# Altium PCB 主板-霍尔BC接地.PcbDoc (part 1 of 6)
Units mm, origin at the board's own origin, x right, y up, seen from the top; angles counter-clockwise.
Board outline 97.69 x 103.45 mm, 2 copper layers (Top Layer, Bottom Layer); 83 components, 83 nets, 266 pads, 295 vias.
Unrouted connection lines stored in the file: 11.
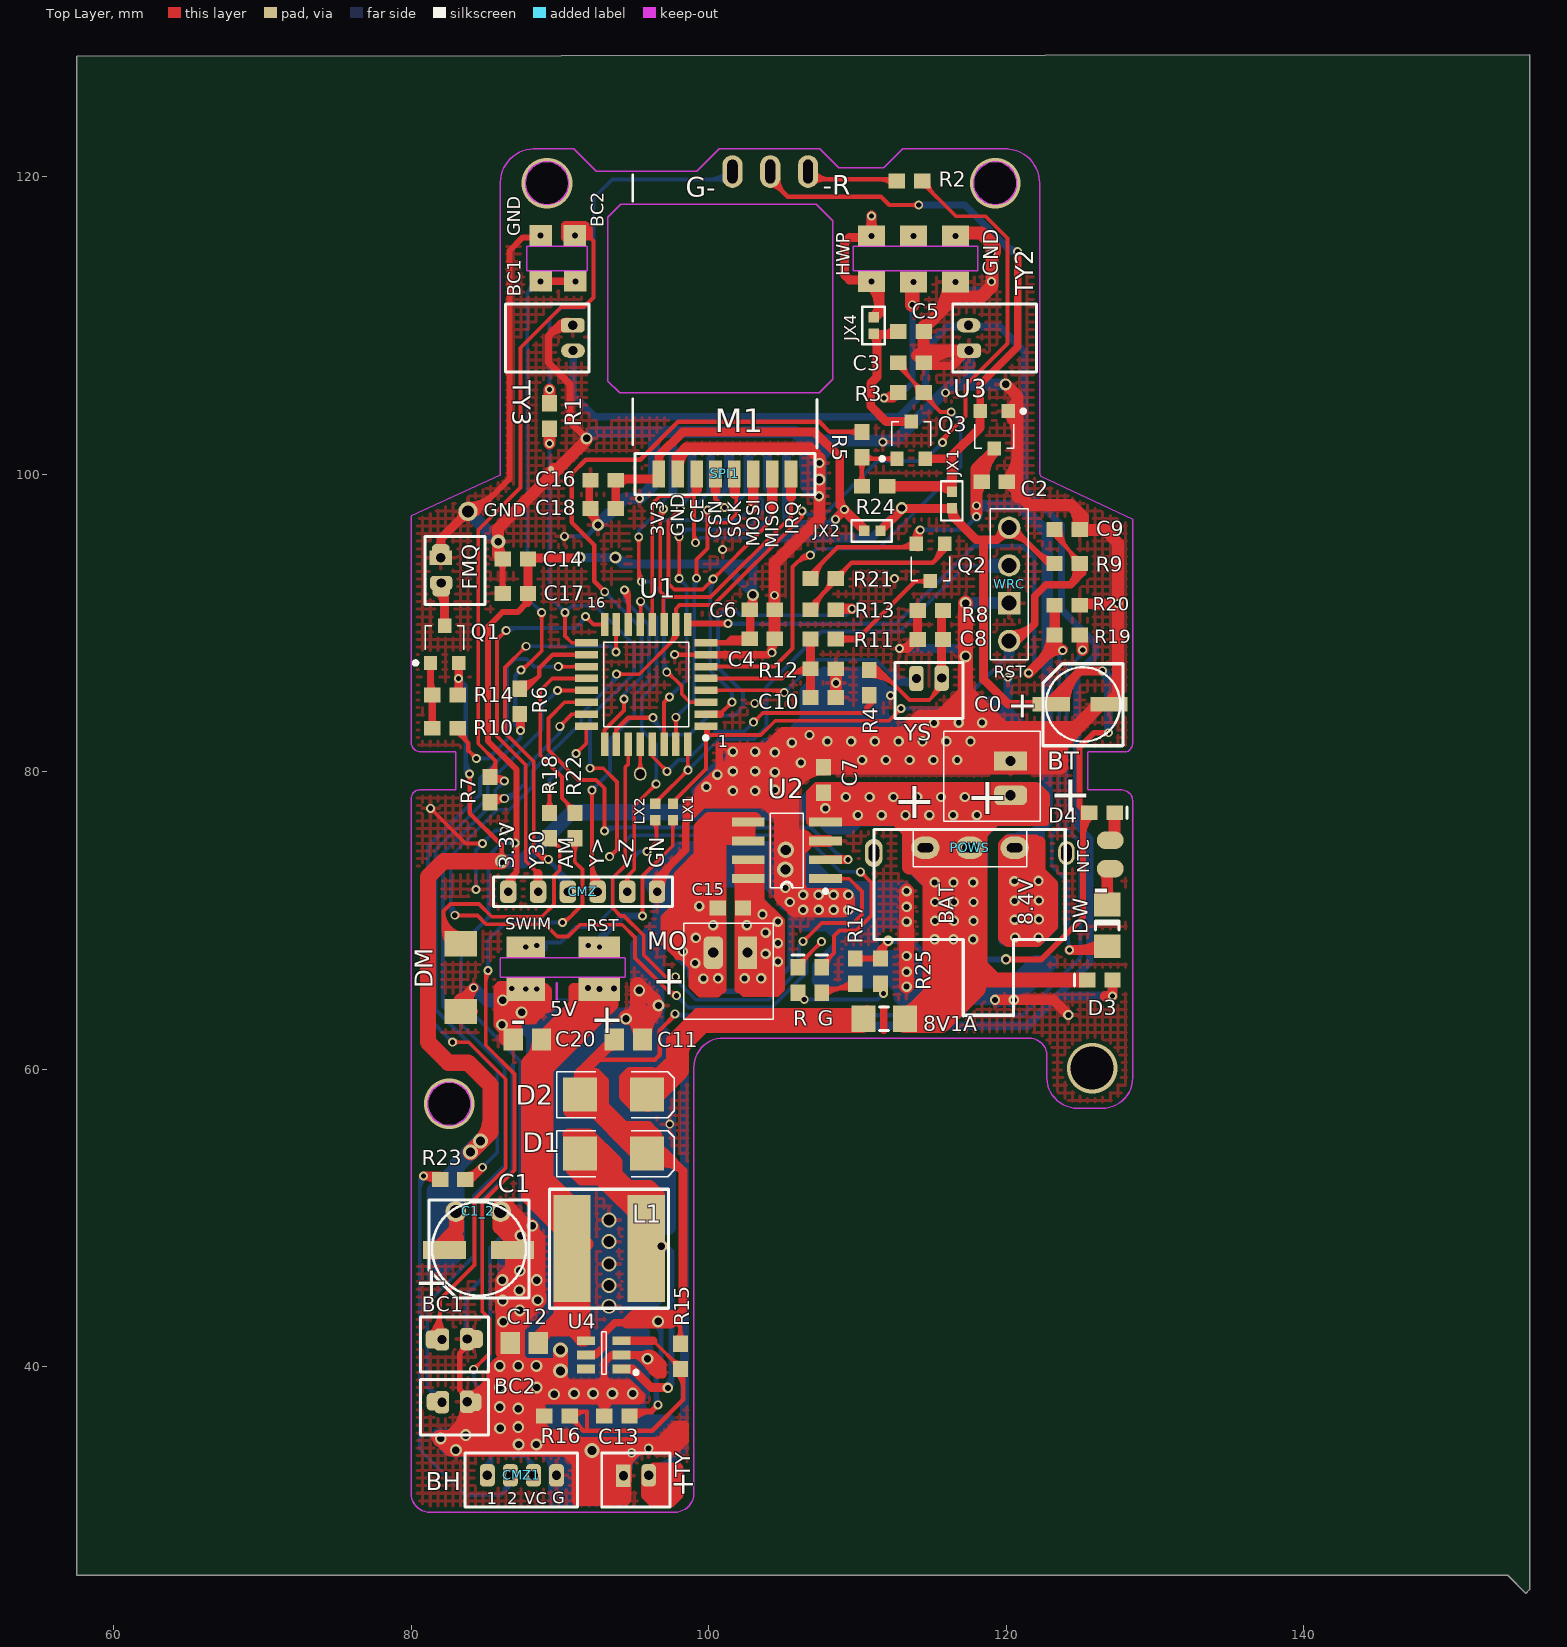
[diagram p0: Top Layer view]
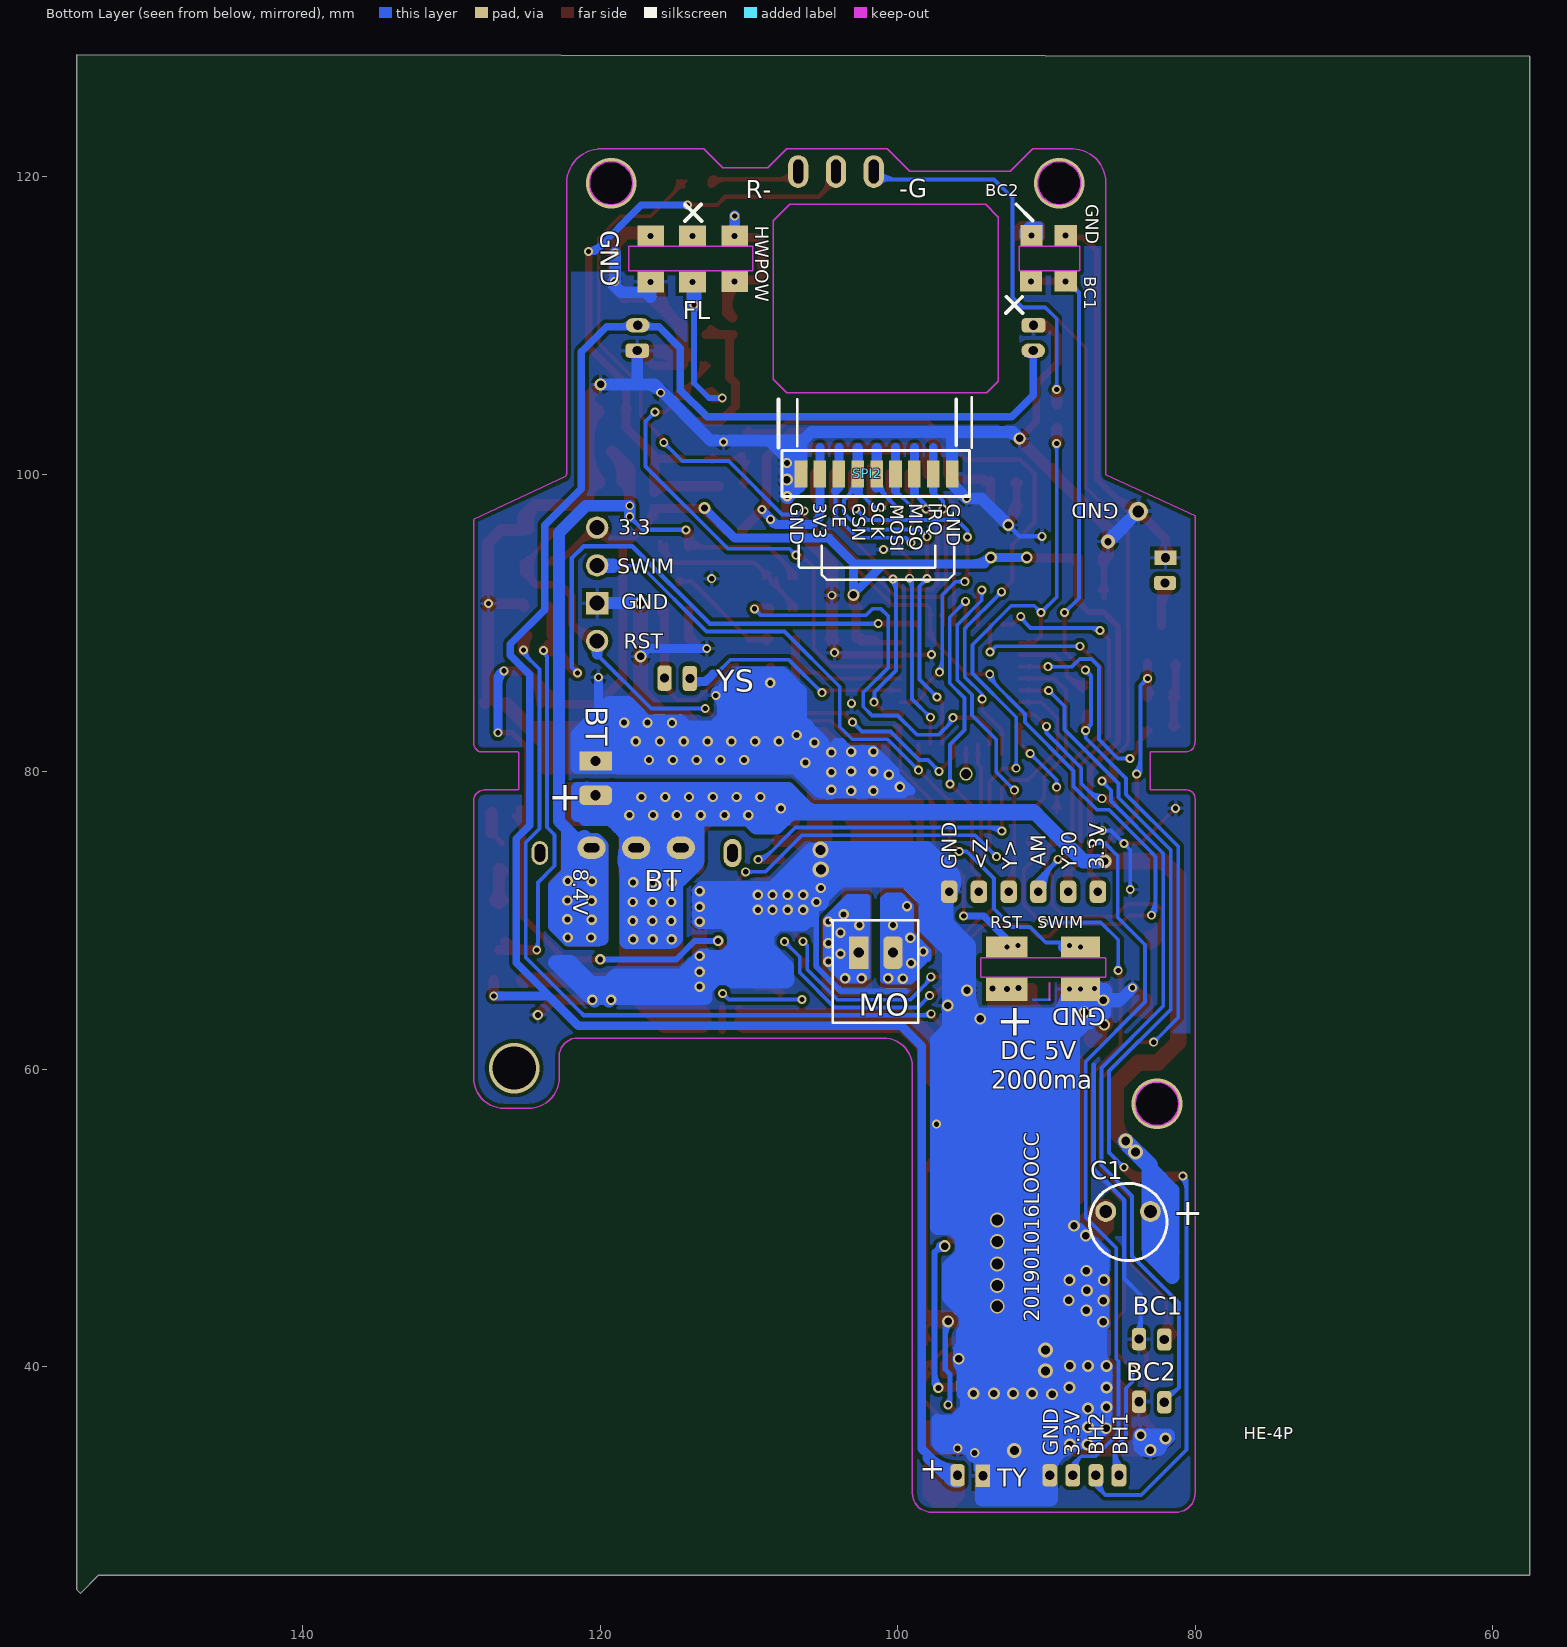
[diagram p1: Bottom Layer view, seen from below]

## Layer stack, top to bottom
Top Layer: signal copper 0.0356
Dielectric: dielectric 0.32, FR-4, Dk 4.8
Bottom Layer: signal copper 0.0356

## Board outline
57.506,128.118 57.506,25.984 153.721,25.984 154.94,24.765 155.194,25.019 155.194,128.219

## Design rules (kind name [scope] priority, off if disabled: settings)
Clearance [All] p1: gap=0.254
PolygonConnect [All] p1: connectstyle=Relief reliefconductorwidth=0.254 reliefentries=4 polygonreliefangle="90 Angle"
RoutingVias [All] p1: holewidth=0.711 width=1.27 viastyle="Through Hole" minholewidth=0.711 minwidth=1.27 maxholewidth=0.711 maxwidth=1.27
SilkscreenOverComponentPads [All] p1: minsilkscreentomaskgap=0.254
SolderMaskExpansion [All] p1: expansion=0.102
Width [All] p1: maxlimit=2 minlimit=0.254 preferedwidth=0.254 minimp=50.000000 maximp=50.000000 favimp=50.000000
27 further rules are at their usual default settings.

## Components (designator, comment, footprint, x,y, rotation, side; value= is the part's Value field where it differs from the comment)
8V1A "LED-DM" CR3216-1206 111.8,63.398 r180 top locked
BC1 "1.5*2P" MHDR1X2#1 83.6,41.859 r180 top locked (schematic designator BT)
BC2 "1.5*2P" MHDR1X2#1 83.6,37.643 r180 top locked (schematic designator BT)
BT "PH2.0-W" HDR1X2#1 120.3,78.032 r90 top locked
C0 "47uf  5*5.8" CC3216-1206#1 123.7,84.932 r0 top locked
C1 "220UF" CC3216-1206#2 85.3,47.39 r180 top locked
C1_2 "" HDR1X2#2 76.987,51 r180 top locked
C2 "0.1uf" CR1608-0603#1 119.2,99.5 r180 top locked
C3 "0.01uf" CR1608-0603#1 113.6,107.5 r180 top locked
C4 "0.1uf" CR1608-0603#1 103.6,88.951 r0 top locked (schematic designator C6)
C5 "10uf" CR1608-0603#1 113.6,109.6 r180 top locked (schematic designator C2)
C6 "0.01uf" CR1608-0603#1 103.6,90.9 r180 top locked (schematic designator C7)
C7 "0.1uf" CR1608-0603#1 107.723,79.45 r270 top locked (schematic designator C11)
C8 "100pf" CR1608-0603#1 114.9,88.9 r0 top locked
C9 "0.1uf" CR1608-0603#1 124.1,96.3 r180 top locked
C10 "100pf" CR1608-0603#1 107.7,85 r0 top locked (schematic designator R11)
C11 "10uf" CR2012-0805 94.6,62 r0 top locked
C12 "10uf" CR2012-0805 87.6,41.6 r180 top locked
C13 "1uf" CR1608-0603#1 93.83,36.7 r180 top locked
C14 "10uf" CR1608-0603#1 87,94.3 r180 top locked (schematic designator R6)
C15 "0.1uf" CR1608-0603#1 101.46,70.85 r0 top locked (schematic designator C4)
C16 "0.1uf" CR1608-0603#1 92.9,99.6 r0 top locked (schematic designator C4)
C17 "10uf" CR1608-0603#1 87,92 r180 top locked (schematic designator R6)
C18 "0.01uf" CR1608-0603#1 92.9,97.7 r0 top locked (schematic designator C4)
C20 "10uf" CR2012-0805 87.808,62 r0 top locked
CMZ "RST   SWIM" MHDR1X7#1 94.15,71.944 r180 top locked
CMZ1 "HE-4P" MHDR1X7#2 83,32.7 r0 top locked
D1 "SS24" DSO-C2/X2.3 93.6,54.33 r0 top locked
D2 "SS24" DSO-C2/X2.3 93.6,58.3 r0 top locked (schematic designator D3)
D3 "SS14" CC1608-0603 126.3,66 r0 top locked (schematic designator D8)
D4 "SS14" CC1608-0603 126.441,77.25 r180 top locked (schematic designator R4)
DM "3*4*2小龟按钮" HDR1X2#3 85.344,70.032 r90 top locked (schematic designator FW)
DW "WD" CC3216-1206#3 126.8,69.672 r270 top locked
FMQ "1.5*2P" MHDR1X2#2 81.991,94.234 r270 top locked (schematic designator BT)
G "LED-G" CC1608-0603 107.6,66 r270 top locked
JX1 "" CR1005-0402 116.357,98.273 r90 top locked (schematic designator R8)
JX2 "" CR1005-0402 111,96.2 r180 top locked
JX4 "" CR1005-0402 111.1,110 r90 top locked (schematic designator R8)
L1 "22UH" L7 93.3,47.94 r180 top locked
LX1 "4.7K" CR1005-0402 97.6,77.292 r90 top locked (schematic designator R8)
LX2 "4.7K" CR1005-0402 96.4,77.292 r90 top locked (schematic designator R8)
MO "PH2.0-W" HDR1X2#4 103,67.843 r180 top locked (schematic designator BT)
POWS "SS12F23" HDR1X3 120.114,74.892 r180 top locked (schematic designator WS)
Q1 "S8550" SO-G3/C2.5 82.245,88.57 r0 top locked (schematic designator Q2)
Q2 "S8550" SO-G3/C2.5 114.91,94.082 r180 top locked (schematic designator Q1)
Q3 "S8550" SO-G3/C2.5 113.614,102.3 r0 top locked (schematic designator U5)
R "LED-R" CC1608-0603 106,66 r270 top locked
R1 "1K" CR1608-0603#1 89.3,103.919 r270 top locked
R2 "1K" CR1608-0603#1 113.5,119.732 r0 top locked
R3 "1K" CR1608-0603#1 113.6,105.5 r180 top locked
R4 "1K" CR1608-0603#1 110.8,86 r270 top locked
R5 "10K" CR1608-0603#1 110.3,102 r90 top locked (schematic designator R7)
R6 "10K" CR1608-0603#1 87.3,84.734 r270 top locked
R7 "10K" CR1608-0603#1 85.3,78.8 r90 top locked (schematic designator R6)
R8 "1M" CR1608-0603#1 114.9,90.856 r180 top locked
R9 "10K" CR1608-0603#1 124.1,94 r180 top locked
R10 "10K" CR1608-0603#2 82.271,82.931 r0 top locked (schematic designator R7)
R11 "1M" CR1608-0603#1 107.7,88.932 r180 top locked (schematic designator C10)
R12 "500K" CR1608-0603#1 107.7,86.932 r180 top locked
R13 "22K" CR1608-0603#1 107.7,90.9 r0 top locked
R14 "22K" CR1608-0603#2 82.271,85.17 r180 top locked (schematic designator R7)
R15 "100K" CR1608-0603#1 98.1,40.7 r270 top locked
R16 "7.89K" CR1608-0603#1 89.8,36.7 r180 top locked
R17 "1K" CR1608-0603#1 109.855,66.6 r270 top locked (schematic designator R3)
R18 "10K" CR1608-0603#1 89.3,76.38 r90 top locked
R19 "10K" CR1608-0603#1 124.1,89.2 r180 top locked (schematic designator R9)
R20 "4.7K" CR1608-0603#1 124.1,91.2 r180 top locked
R21 "22K" CR1608-0603#1 107.7,93 r0 top locked
R22 "10K" CR1608-0603#1 91,76.38 r90 top locked (schematic designator R2)
R23 "10K" CR1608-0603#1 82.791,52.6 r0 top locked (schematic designator R2)
R24 "500K" CR1608-0603#1 111.157,99.2 r180 top locked (schematic designator R7)
R25 "1K" CR1608-0603#1 111.557,66.6 r270 top locked (schematic designator R3)
SPI1 "SI24R1" MHDR1X8 105.537,100.032 r180 top locked
SPI2 "NRF24RL01" MHDR1X8 97.6,100.032 r0 bottom locked
TY "1.5*2P" MHDR1X2#3 95.8,32.7 r180 top locked (schematic designator BT)
TY2 "1.5*2P" MHDR1X2#4 117.475,109.855 r270 top locked (schematic designator BT)
TY3 "1.5*2P" MHDR1X2#4 90.881,108.483 r90 top locked (schematic designator BT)
U1 "STM8L151K4T6" TQFP32 95.8,85.877 r180 top locked
U2 "MX380（RZ7889D）" SO8 105.254,74.722 r90 top locked
U3 "ME6209-V1RK" SO-G3/C2.5 119.2,103 r180 top locked (schematic designator U5)
U4 "SX1308   B6287K  B6286" SOT23-6_M 92.95,40.8 r180 top locked
WRC "2.54HP" HDR1X4 120.2,88.8 r90 top locked (schematic designator SX)
YS "1.5*2P" MHDR1X2#5 115.5,86.3 r180 top locked (schematic designator BT)

## Footprints (in the part's own frame and the unit in brackets; to place one, negate y for a bottom-side part, rotate by r counter-clockwise, add the part's x,y. Pads: shape width x height; smd on the part's side, far side on the other; paste and mask are expansions set on the pad)
CC1608-0603 [mm]
  rect 1.1x1 smd: 1(-0.85,0) 2(0.85,0)
  silkscreen extent -1.7,-0.4 -1.7,0.4
CC3216-1206#1 [mm]
  rect 2.5x1 smd: 1(-0.662,-0.386) 2(3.213,-0.386)
CC3216-1206#2 [mm]
  rect 2.9x1.2 smd: 1(-1.5,-0.45) 2(3.068,-0.455)
CC3216-1206#3 [mm] "Chip Capacito"
  rect 1.6x1.8 smd: 1(-1.4,0) 2(1.4,0)
  silkscreen extent -0.3,-0.8 0.3,0.8
CR1005-0402 [mm]
  rect 0.7x0.7 smd: 1(-0.55,0) 2(0.55,0)
CR1608-0603#1 [mm]
  rect 1.1x1 smd: 1(-0.85,0) 2(0.85,0)
CR1608-0603#2 [mm]
  rect 1.1x1 smd: 1(-0.85,0)
  rect 1.1x1 smd paste+0: 2(0.85,0)
CR2012-0805 [mm] "Chip Resistor; Body 2.0 x 1.3 mm (LxW typ)"
  rect 1.3x1.5 smd: 1(-0.95,0) 2(0.95,0)
CR3216-1206 [mm] "Chip Resistor; Body 3.2 x 1.6 mm (LxW t"
  rect 1.6x1.8 smd: 1(-1.4,0) 2(1.4,0)
  silkscreen extent -0.3,-0.8 0.3,0.8
DSO-C2/X2.3 [mm] "DO-214-AA/SMB; 2 C-Bend Leads; Body 5.3 x 3.6 mm, inc. leads (LxW)"
  rect 2.3x2.3 smd: 1(-2.25,0) 2(2.25,0)
  silkscreen extent -3.8,-1.55 4.1,1.55
HDR1X2#1 [mm]
  rrect50% 1.3x2.2 hole 0.68: 1(0.39,0)
  rect 1.3x2.2 hole 0.68: 2(2.692,0.003)
  silkscreen extent -1.34,-1.99 4.68,4.49
HDR1X2#2 [mm] "Connector; Header; 2 Position"
  round 1.4 hole 0.86: 1(-9.013,0.558) 2(-6.013,0.558)
HDR1X2#3 [mm]
  rect 1.7x2.2 smd: 1(-6.147,2.004) 2(-1.6,2.004)
HDR1X2#4 [mm]
  rect 1.3x2.2 hole 0.68: 1(0.39,0)
  rrect50% 1.3x2.2 hole 0.68: 2(2.692,0.003)
  silkscreen extent -1.34,-1.99 4.68,4.49
HDR1X3 [mm]
  oval 1.9x1.5 hole 0.6 slot 1.05 at 0 deg: 1(-0.46,0) 2(2.54,0) 3(5.54,0)
  silkscreen extent -1.27,-1.27 6.35,1.27
HDR1X4 [mm]
  round 1.5 hole 1: 1(0,0) 3(5.08,0) 4(7.62,0)
  rect 1.5x1.5 hole 1: 2(2.54,0)
  silkscreen extent -1.27,-1.27 8.89,1.27
L7 [mm]
  rect 2.5x7.2 smd: 1(2.5,0) 2(-2.5,0)
  silkscreen extent -4,-4 4,4
MHDR1X2#1 [mm]
  rrect50% 0.96x1.5 hole 0.62: 1(-0.164,0) 2(1.536,0.026)
  silkscreen extent -1.61,-1.49 2.97,2.22
MHDR1X2#2 [mm]
  rect 0.96x1.5 hole 0.62: 1(-0.164,0)
  rrect50% 0.96x1.5 hole 0.62: 2(1.536,0.026)
  silkscreen extent -1.6,-1.07 2.97,2.97
MHDR1X2#3 [mm]
  rrect50% 0.96x1.5 hole 0.62: 1(-0.164,0)
  rect 0.96x1.5 hole 0.62: 2(1.536,0.026)
  silkscreen extent -1.6,-1.52 2.99,2.14
MHDR1X2#4 [mm]
  oval 0.96x1.6 hole 0.62: 1(-0.164,0)
  rrect50% 0.96x1.6 hole 0.62: 2(1.536,0.026)
  silkscreen extent -1.6,-1.07 2.97,4.55
MHDR1X2#5 [mm]
  rrect50% 0.96x1.7 hole 0.62: 1(-0.164,0) 2(1.536,0.026)
  silkscreen extent -1.6,-1.07 2.97,2.72
MHDR1X7#1 [mm] "Connector; Header; 7 Position"
  rrect50% 1.1x1.5 hole 0.58: 2(-2.38,0) 3(-0.38,0) 4(1.62,0) 5(3.62,0) 6(5.62,0) 7(7.62,0)
  silkscreen extent -3.41,-1 8.62,1
MHDR1X7#2 [mm] "Connector; Header; 7 Position"
  rrect50% 1x1.5 hole 0.62: 4(2.12,0) 5(3.67,0) 6(5.22,0) 7(6.77,0)
  silkscreen extent 0.63,-2.14 8.18,1.49
MHDR1X8 [mm] "Connector; Header; 8 Position"
  rect 0.85x1.8 smd: 1(0,0) 2(1.27,0) 3(2.54,0) 4(3.81,0) 5(5.08,0) 6(6.35,0) 7(7.62,0) 8(8.89,0)
  silkscreen extent -1.6,-1.37 10.49,1.4
SO8 [mm]
  rect 0.6x2.2 smd: 1(-1.905,-2.6) 2(-0.635,-2.6) 3(0.635,-2.6) 4(1.905,-2.6) 5(1.905,2.6) 6(0.635,2.6) 7(-0.635,2.6) 8(-1.905,2.6)
  silkscreen extent -2.88,-2.72 2.5,1.1
SO-G3/C2.5 [mm]
  rect 0.9x0.95 smd: 1(-0.95,-1.25) 2(0.95,-1.25) 3(0,1.25)
  silkscreen extent -2.07,-1.37 1.3,1.25
SOT23-6_M [mm]
  rect 1.2x0.59 smd: 1(-1.2,0.95) 2(-1.2,0) 3(-1.2,-0.95) 4(1.2,-0.95) 5(1.2,0) 6(1.2,0.95)
  silkscreen extent -2.29,-1.55 0.15,1.31
TQFP32 [mm] "QFP; 32 Leads; Body 7 x 7 mm; Pitch 0.8 mm"
  rect 1.55x0.5 smd: 1(-4.025,2.8) 2(-4.025,2) 3(-4.025,1.2) 4(-4.025,0.4) 5(-4.025,-0.4) 6(-4.025,-1.2) 7(-4.025,-2) 8(-4.025,-2.8) 18(4.025,-2) 19(4.025,-1.2) 20(4.025,-0.4) 21(4.025,0.4) 22(4.025,1.2) 23(4.025,2) 24(4.025,2.8)
  rect 0.5x1.55 smd: 9(-2.8,-4.025) 10(-2,-4.025) 11(-1.2,-4.025) 12(-0.4,-4.025) 13(0.4,-4.025) 14(1.2,-4.025) 15(2,-4.025) 16(2.8,-4.025) 26(2,4.025) 27(1.2,4.025) 28(0.4,4.025) 29(-0.4,4.025) 30(-1.2,4.025) 31(-2,4.025) 32(-2.8,4.025)
  rect 1.55x0.5 smd mask+0.102: 17(4.025,-2.8)
  rect 0.5x1.55 smd paste+0: 25(2.8,4.025)
  silkscreen extent -4.13,-2.85 2.85,3.72

## Part data
D3: library part "Cap Semi", "Capacito"
DW: library part "Cap Semi"
U1: library part ST72F324K4T6

## Free pads (board coordinates)
  rrect50% 1.2x1.2 smd: 0(81.559,41.834) 0(81.636,37.643) 0(81.991,94.717) 0(82.017,92.38) 0(84.125,37.617) 0(84.226,41.859)
  rrect50% 1.2x1.2 on Top Solder: 0(82.042,92.405) 0(82.042,94.691) 0(93.802,32.69) 0(96.368,32.69)
  rect 2.6x1.6 hole 0.35: 0(87.7,65.4)
  rect 2.6x1.4 hole 0.35: 0(87.7,68.222)
  rect 1.5x1.4 hole 0.4: 0(88.7,112.98) 0(88.7,116.053) 0(91,116.053) 0(91.032,112.98)
  round 0.4 smd: 0(89.408,100.355)
  rect 2.8x1.6 hole 0.4 mask+0.102: 0(92.65,65.4)
  rect 2.8x1.4 hole 0.35: 0(92.65,68.222)
  oval 0.86x0.9 hole 0.65: 0(95.402,79.858)
  rect 0.85x1.8 smd far side: 0(96.33,100.032)
  oval 1.36x2.2 hole 0.68 slot 1.6 at 90 deg: 0(101.6,120.36)
  oval 1.36x2.2 hole 0.65 slot 1.6 at 90 deg: 0(104.14,120.36) 0(106.68,120.36)
  rect 1.8x1.4 hole 0.4: 0(110.95,112.956) 0(110.95,116.032) 0(113.78,112.932) 0(113.78,116.032) 0(116.6,112.932) 0(116.6,116.032)
  oval 1.2x1.9 hole 0.7 slot 1.2 at 90 deg: 3(111.103,74.545)
  round 1.3 hole 0.8 paste+0: 4(83.82,97.511)
  oval 1.1x1.6 hole 0.7 slot 1.2 at 90 deg: 4(124.051,74.545)
  oval 1.8x1.2 smd: 4(127,73.482) 4(127,75.4)

## Via types
v1: diameter 0.6, hole 0.35, Top Layer to Bottom Layer, 117 vias
v2: diameter 0.7, hole 0.4, Top Layer to Bottom Layer, 104 vias
v3: diameter 0.8, hole 0.5, Top Layer to Bottom Layer, tented both sides, 32 vias
v4: diameter 0.8, hole 0.5, Top Layer to Bottom Layer, 15 vias
v5: diameter 1, hole 0.6, Top Layer to Bottom Layer, tented both sides, 5 vias
v6: diameter 1, hole 0.75, Top Layer to Bottom Layer, tented both sides, 5 vias
v7: diameter 3.4, hole 2.9, Top Layer to Bottom Layer, 4 vias
v8: diameter 0.65, hole 0.4, Top Layer to Bottom Layer, tented both sides, 2 vias
v9: diameter 0.8, hole 0.35, Top Layer to Bottom Layer, 2 vias
v10: diameter 0.7, hole 0.35, Top Layer to Bottom Layer, 2 vias
v11: diameter 1.1, hole 0.68, Top Layer to Bottom Layer, 2 vias
v12: diameter 0.62, hole 0.4, Top Layer to Bottom Layer, 1 vias
v13: diameter 0.95, hole 0.5, Top Layer to Bottom Layer, 1 vias
v14: diameter 0.9, hole 0.5, Top Layer to Bottom Layer, tented both sides, 1 vias
v15: diameter 0.7, hole 0.4, Top Layer to Bottom Layer, tented bottom, 1 vias
v16: diameter 0.8, hole 0.5, Top Layer to Bottom Layer, tented bottom, 1 vias

## Nets (pads, with @x,y where several pads share a name; then routed paths per layer and width w, separated by ;. In a path a pad name is that pad's centre, name@x,y a point inside that pad or via, vN(x,y) a via of type N, cw(c..) or ccw(c..) an arc to the next point about the centre after c; other vN are vias at no path point)
1D-: D1.1 L1.2 U4.1 | length 58.4
  Top Layer w0.59: U4.1@94.2,39.85 94.897,39.85 96.139,38.608 v15@97.257,38.608 ; U4.1@94.455,39.85 cw(c94.455,38.783) 95.209,39.538
  Top Layer w0.8: 90.576,55.626 91.948,55.626 93.802,53.772 ; D1.1@90.76,54.942 cw(c91.696,53.971) 92.649,54.925 ; D1.1@90.932,53.708 cw(c90.403,52.922) 91.35,52.922 ; D1.1@91.315,54.366 cw(c92.261,53.384) 93.226,54.348 ; D1.1@91.769,53.708 ccw(c92.297,52.922) 91.35,52.922 ; D1.1@91.87,53.79 cw(c92.827,52.797) 93.802,53.772 ; 93.447,52.603 93.177,52.603 91.669,52.603 ; 93.497,53.823 93.497,52.883 ; 94.259,52.172 94.615,52.172 ; L1.2@95.225,51.537 96.672,51.537 96.037,52.172 94.615,52.172 ; L1.2@95.8,49.98 95.8,49.081 96.23,48.652 L1.2@96.23,49.476 ; 91.35,52.922 91.669,52.603 ; 91.35,52.922 D1.1@91.35,54.33 90.805,53.238 91.44,52.603 91.669,52.603 ; 91.669,52.603 91.948,52.883 92.897,52.883 93.497,52.883 ; 93.497,52.883 93.802,52.883 ; 93.497,52.883 93.497,52.578 93.802,52.883 ; 93.802,52.883 93.904,52.883 94.615,52.172 ; 93.802,52.883 93.802,53.772
  Top Layer w1.5: D1.1@91.35,54.33 91.45,54.33 91.635,54.145 91.991,54.145 92.38,54.534 92.862,54.051 92.862,54.026 ; D1.1@91.656,54.588 ccw(c92.862,55.601) 92.862,54.026 ; 94.417,51.363 ccw(c95.8,52.746) L1.2@95.8,50.79 ; L1.2@95.8,49.98 93.177,52.603 92.897,52.883 91.754,54.026 92.862,54.026
  Bottom Layer w0.4: v3@96.858,47.91 cw(c96.981,47.172) 97.511,47.701 ; v3@97.104,48.108 97.511,47.701 ; v15@97.151,38.689 ccw(c96.281,39.558) 97.511,39.558 ; v15(97.257,38.583) 97.511,38.837 97.511,47.701
  Bottom Layer w0.6: v3(96.825,48.108) v3@97.104,48.108
1R-1: R15.2 R16.1 U4.3 | length 24.2
  Top Layer w0.254: R16.1@90.667,37.008 91.821,37.008 ; R16.1@90.806,36.645 cw(c91.403,36.335) 91.403,37.008 ; R16.1@91.031,36.528 cw(c91.821,36.118) 91.821,37.008 ; 91.821,35.789 91.821,37.008 ; 96.274,41.75 98.074,39.95 R15.2@98.302,39.95 ; 97.447,40.577 cw(c96.77,39.9) R15.2@97.727,39.9 ; 97.503,40.52 ccw(c98.1,41.117) R15.2@98.1,40.273
  Top Layer w0.3: R16.1@90.673,36.606 91.574,35.705 96.208,35.705 98.298,37.795 R15.2@98.298,39.518 ; R16.1@90.7,36.35 cw(c90.7,35.796) 91.092,36.188 ; R16.1@91.05,36.7 ccw(c92.186,36.7) 91.383,35.897 ; R15.2@97.853,39.553 cw(c96.777,38.477) 98.298,38.477 ; R15.2@98.065,39.765 cw(c97.501,39.201) 98.298,39.201
  Top Layer w0.5: R16.1@90.673,36.606 R16.1@90.673,36.7
  Top Layer w0.59: U4.3@94.15,41.75 96.274,41.75
3-BH: 
3-WZ: 
3.3V: C0.1 C4.1 C6.2 C14.1 C16.2 C17.1 C18.2 CMZ1.6 CMZ.7 D4.2 JX1.1 JX1.2 JX2.1 JX2.2 pad.0@104.14,120.36 Q3.2 R9.2 R17.1 R24.1 R25.1 SPI1.8 SPI2.7 U1.8 U3.2 WRC.4 | length 309.7
  Top Layer w0.254: v1@126.721,82.626 126.873,82.474 v1(126.873,82.626)
  Top Layer w0.3: pad.0@104.14,119.41 cw(c104.14,118.379) 104.869,119.108 ; pad.0@104.14,119.837 105.308,118.669 111.582,118.669 112.141,118.11 v1(114.122,118.11) ; pad.0@104.37,119.94 ccw(c105.173,119.94) 104.605,119.372 ; pad.0@104.67,119.94 ccw(c106.198,119.94) 105.117,118.86 ; v1@114.016,118.004 ccw(c113.76,117.748) 113.76,118.11 ccw(c113.76,118.472) v1@114.016,118.216
  Top Layer w0.4: CMZ.7@86.372,72.456 ccw(c86.243,72.712) 86.53,72.712 ; CMZ.7@86.483,72.126 cw(c87.092,72.355) 86.632,72.815 ; CMZ.7@86.53,71.944 86.53,72.712 ; CMZ.7@86.688,72.456 cw(c86.817,72.712) 86.53,72.712 ; CMZ.7@86.858,72.267 cw(c87.73,72.594) 87.071,73.254 ; v1@86.899,75.139 cw(c86.483,74.723) 87.071,74.723 ; v1@86.899,75.28 ccw(c86.483,75.696) 87.071,75.696 ; C17.1@87.642,91.5 87.85,91.292 ; 87.71,91.292 87.157,90.738 86.141,90.738 85.166,89.764 85.166,82.067 87.071,80.162 87.071,73.254 ; C16.2@93.751,99.593 94.056,99.593 C16.2@94.158,99.492 ; SPI1.8@96.647,99.746 SPI1.8@96.647,100.032 ; U1.8@99.825,88.677 100.711,88.677 ; 101.316,88.677 ccw(c101.316,90.335) 102.488,89.163 cw(c101.976,89.675) 101.976,88.951 cw(c101.976,88.227) C4.1@102.488,88.739 ; C4.1@102.667,88.873 102.472,88.677 100.711,88.677 ; C4.1@102.95,88.951 101.518,88.951 101.244,88.677 100.711,88.677 ; R17.1@109.855,67.22 R17.1@109.88,67.246 ; R17.1@109.855,67.45 R25.1@111.531,67.45 ; R17.1@110.067,67.238 cw(c110.579,66.726) 110.579,67.45 cw(c110.579,68.174) R17.1@110.067,67.662 ; R25.1@111.345,67.238 ccw(c110.832,66.726) 110.832,67.45 ccw(c110.832,68.174) R25.1@111.345,67.662 ; R25.1@111.37,67.735 ccw(c111.06,68.123) 111.557,68.123 ; R25.1@111.463,67.466 cw(c112.108,67.702) 111.622,68.188 ; R25.1@111.557,67.246 111.557,68.123 ; R25.1@111.744,67.735 cw(c112.053,68.123) 111.557,68.123 ; R25.1@111.838,67.603 cw(c112.756,67.94) v2(112.065,68.631) 111.557,68.123 ; v2@111.915,68.631 cw(c111.553,68.631) 111.809,68.375 cw(c112.065,68.119) v2@112.065,68.481 ; v2@111.92,68.592 cw(c111.57,68.498) 111.884,68.317 cw(c112.197,68.136) v2@112.104,68.486 ; v2(119.99,67.386) 122.352,67.386 125.171,70.206 125.171,77.445 124.917,77.699 ; v2@120.096,67.28 cw(c120.352,67.024) 120.352,67.386 cw(c120.352,67.748) v2@120.096,67.492 ; WRC.4@120.2,95.87 cw(c120.2,94.012) 121.514,95.326 ; WRC.4@120.2,96.27 cw(c120.2,95.378) 120.831,96.009 ; WRC.4@120.42,96.42 122.751,94.089 R9.2@123.539,94.089 ; WRC.4@120.75,96.42 ccw(c121.547,96.42) 120.984,95.856 ; 122.073,94.767 ccw(c123.2,95.894) R9.2@123.2,94.3 ; 125.171,75.632 cw(c127.159,75.632) D4.2@125.753,77.038 ; 125.171,76.598 cw(c126.193,76.598) D4.2@125.47,77.321 ; D4.2@125.472,77.542 cw(c125.335,78.116) 124.917,77.699 ; v1@126.721,82.626 125.908,82.626 124.917,81.636 124.917,77.699 ; 86.53,72.712 87.071,73.254
  Top Layer w0.5: U3.2@118.109,104.416 ccw(c117.767,104.758) 118.25,104.758 ccw(c118.733,104.758) U3.2@118.391,104.416 ; U3.2@118.25,104.25 118.25,106.055 120.777,108.582 v1(120.777,114.986)
  Top Layer w0.6: 87.845,91.452 87.845,94.386 v4@91.313,94.386 ; C14.1@88.041,94.159 cw(c88.591,93.609) 88.591,94.386 ; v4(93.726,94.412) v4@93.75,94.436 ; C16.2@93.751,99.593 93.751,98.081 C18.2@93.966,97.866 ; C16.2@93.941,99.459 cw(c94.512,98.888) 94.512,99.695 ; C16.2@93.965,99.487 cw(c94.361,99.214) 94.361,99.695 ; C16.2@94.158,99.492 94.361,99.695 ; 96.012,99.695 cw(c96.012,98.921) SPI1.8@96.559,99.468 ; C6.2@102.659,91.041 ccw(c101.842,91.858) v4@102.997,91.858 ; C4.1@102.794,88.949 C6.2@102.794,91.008 ; v4@102.887,91.844 cw(c102.318,91.484) C6.2@102.794,91.008 ; v4@102.997,91.897 102.997,91.211 C6.2@102.794,91.008 ; v1@108.521,96.99 v1@109.118,97.587 ; 108.814,98.373 ccw(c109.854,98.373) v1(109.118,97.638) ; v1@109.031,97.7 108.814,97.917 108.814,101.168 107.137,102.845 98.252,102.845 96.647,101.239 SPI1.8@96.647,100.032 96.31,99.695 94.361,99.695 ; JX2.1@111.55,96.2 113.05,97.7 116.38,97.7 116.38,97.209 117.983,95.606 119.386,95.606 WRC.4@120.2,96.42 ; 112.731,97.38 ccw(c112.372,97.739) v4@112.879,97.739 ; Q3.2@114.564,101.05 116.357,101.05 ; 116.357,100.574 116.357,101.05 ; JX1.1@116.407,97.722 ccw(c117.714,97.722) 116.79,96.799 ; U3.2@118.25,104.25 118.25,103.137 116.357,101.244 116.357,101.05 ; 118.339,95.606 118.478,95.466 118.478,86.22 120.153,84.546 C0.1@123.038,84.546 ; WRC.4@119.75,96.42 cw(c118.664,96.42) 119.432,95.652 cw(c120.2,94.884) WRC.4@120.2,95.97 ; C0.1@122.788,84.546 cw(c122.947,84.546) C0.1@122.835,84.658 ; C0.1@123.138,84.546 C0.1@123.038,84.546 ; C0.1@123.388,84.546 cw(c124.996,84.546) 123.859,85.683 ; C0.1@123.988,84.546 cw(c127.044,84.546) 124.883,86.707 ; v1(126.467,86.792) 124.968,86.792 123.038,84.862 C0.1@123.038,84.546
  Top Layer w0.7: v1@109.031,97.7 110.449,96.281 JX2.2@110.449,96.2 ; v1@109.118,97.587 v1(109.118,97.638) ; R24.1@112.007,99.2 116.32,99.2 116.357,99.238 ; 115.445,99.2 cw(c115.445,97.91) JX1.2@116.357,98.822 116.357,99.238 ; 116.357,100.553 116.357,99.238
  Top Layer w0.8: pad.0@104.14,119.837 pad.0@104.14,120.36
  Top Layer w1: WRC.4@120.2,96.42 WRC.4@120.42,96.42
  Bottom Layer w0.254: v1@86.847,75.087 ccw(c86.552,74.792) 86.552,75.209 ccw(c86.552,75.627) v1@86.847,75.332 ; v1(86.97,75.209) 86.054,75.209 85.192,74.347 85.192,70.206 83.363,68.377 83.363,64.519 87.351,60.531 87.351,50.038 85.293,47.981 85.293,40.524 85.141,40.372 85.141,35.533 86.689,33.985 87.681,33.985 ; CMZ1.6@87.872,33.084 ccw(c87.083,33.388) 87.681,33.985 ; 87.957,33.709 cw(c87.482,33.234) CMZ1.6@88.109,32.993 ; CMZ1.6@88.04,33.277 ccw(c87.92,33.496) 88.17,33.496 ; CMZ1.6@88.17,32.7 88.17,33.496 ; CMZ1.6@88.313,33.311 cw(c88.361,33.496) 88.17,33.496 ; 87.681,33.985 88.17,33.496
  Bottom Layer w0.4: v2(112.065,68.631) 113.64,68.631 114.884,67.386 v2(119.99,67.386) ; v2@112.171,68.525 cw(c112.427,68.269) 112.427,68.631 cw(c112.427,68.993) v2@112.171,68.737 ; v2@119.884,67.28 ccw(c119.627,67.024) 119.627,67.386 ccw(c119.627,67.748) v2@119.884,67.492
  Bottom Layer w0.5: v1(114.122,118.11) 117.221,118.11 120.345,114.986 v1(120.777,114.986) ; 119.955,115.376 ccw(c120.777,116.199) v1@120.777,115.036
  Bottom Layer w0.6: v4(91.313,94.412) v4(93.726,94.412) 94.158,93.98 102.845,93.98 ; v4@93.797,94.483 ccw(c95.01,95.696) 95.01,93.98 ; 101.003,93.916 102.997,91.923 v4(102.972,91.897) 102.972,94.056 104.623,95.707 110.947,95.707 v4(112.979,97.739) ; 105.22,101.803 105.22,97.116 105.71,96.626 108.107,96.626 ; v1(108.534,96.977) cw(c108.107,97.062) 108.107,96.626 ; v1(109.118,97.638) 108.107,96.626 ; WRC.4@120.2,96.42 WRC.4@120.2,96.716 ; v1(126.873,82.626) 126.873,86.385 v1(126.467,86.792) ; 126.873,85.811 ccw(c125.485,85.811) v1(126.467,86.792) ; 126.873,86.217 ccw(c126.263,86.217) v1(126.467,86.792)
3V3: 
5V: C12.1 C20.2 L1.1 pad.0@92.65,65.4 U4.4 | length 139.6
  Top Layer w0.4: U4.4@91.498,41.75 91.318,41.826 U4.4@91.75,41.75
  Top Layer w0.7: C12.1@88.55,42 ccw(c88.55,42.724) 89.062,42.212 ccw(c89.574,41.7) 88.85,41.7 cw(c90.524,41.7) 89.34,42.884 ; C20.2@88.658,62 88.658,62.101 90.925,64.369 90.925,65.456 v2(91.872,65.456) ; C20.2@89.058,62.1 cw(c90.026,62.1) 89.341,62.785 ; L1.1@90.164,44.954 cw(c88.003,42.792) 91.059,42.792 ; L1.1@90.805,45.263 91.059,45.009 91.059,42.189 U4.4@91.389,41.859 ; 90.856,42.393 88.849,42.393 ; 91.059,42.549 ccw(c92.244,42.549) U4.4@91.406,41.711 ; 91.059,44.042 cw(c92.348,44.042) L1.1@91.437,44.954 ; 88.849,42.393 ccw(c89.142,42.1) 88.799,41.868 cw(c89.142,42.1) 88.849,42.393 ; 88.849,42.393 89.954,43.497 90.272,43.815 90.272,43.422 88.45,41.6 88.45,41.993 88.849,42.393
  Top Layer w0.8: 88.519,52.349 88.519,53.264 ; 89.954,43.333 cw(c91.454,43.333) L1.1@91.037,44.774 ; 89.954,43.497 89.954,47.094 L1.1@90.8,47.94 ; L1.1@89.954,44.398 cw(c91.146,44.398) L1.1@90.814,45.542 ; L1.1@90.23,44.959 cw(c87.344,41.764) U4.4@91.65,41.764 ; 90.272,43.738 cw(c91.355,43.738) L1.1@91.044,44.776 ; 90.272,43.815 90.272,45.263 L1.1@90.8,47.94 ; L1.1@90.633,51.124 cw(c90.246,53.06) 88.849,51.664 90.8,49.713 90.8,48.519 L1.1@90.8,47.94 ; L1.1@90.767,45.553 cw(c88.97,43.565) 91.65,43.565 ; 90.856,42.393 U4.4@91.389,41.859 ; L1.1@91.389,47.351 L1.1@90.8,47.94 ; U4.4@91.65,41.859 L1.1@91.65,47.351 ; 88.519,53.264 88.557,53.302 88.557,56.363 88.519,56.325 88.519,53.264
  Top Layer w1: 87.884,52.781 87.884,51.435 ; 88.078,60.62 ccw(c86.798,61.9) C20.2@88.608,61.9 ; 88.758,61.25 ccw(c88.758,62.661) 89.756,61.663 ; 88.849,51.664 87.884,51.664 87.884,55.499 87.884,60.427 91.948,64.491 pad.0@91.948,64.846 ; 88.898,50.421 ccw(c90.158,51.681) L1.1@90.905,50.063 ; 88.925,59.868 89.052,59.995 ; 88.925,60.833 pad.0@92.75,64.658 ; L1.1@89.912,49.407 ccw(c90.799,50.293) L1.1@91.324,49.155 ; L1.1@90.05,50.291 ccw(c86.644,50.296) 89.052,52.705 ; 90.379,62.921 cw(c88.758,64.543) 88.758,62.25 ccw(c88.758,66.076) 91.463,63.37 ; L1.1@90.486,50.971 cw(c89.518,53.068) 87.884,51.435 ; L1.1@90.8,48.519 87.884,51.435 ; L1.1@90.8,49.713 90.8,50.957 89.052,52.705 ; L1.1@90.926,48.393 ccw(c91.439,48.906) L1.1@91.743,48.247 ; 91.948,64.485 cw(c92.89,64.485) pad.0@92.253,65.179 ; pad.0@92.438,65.188 cw(c91.684,64.434) 92.75,64.434 ; pad.0@93.063,65.165 cw(c92.43,64.37) 93.447,64.37 ; 89.052,52.705 89.052,56.363 ; 89.052,56.363 88.557,56.363 88.557,60.008 88.138,60.427 88.621,60.427 89.052,59.995 ; 89.052,56.363 89.052,59.995 ; 89.052,59.995 92.75,63.692 ; 92.75,63.692 93.447,64.389 93.447,64.735 92.75,65.432 pad.0@92.75,64.658 ; 92.75,63.692 pad.0@92.75,64.658
  other v2: 93.624,65.43
8.4V: C2.2 POWS.1 Q2.2 R21.1 U3.3 | length 167.4
  Top Layer w0.3: R21.1@106.85,93 106.85,93.286 108.661,95.098 Q2.2@114.061,95.098 ; R21.1@106.95,93 cw(c107.883,93) 107.223,93.66 ; R21.1@107.25,93 cw(c108.907,93) 107.735,94.172 ; 112.731,95.098 ccw(c112.731,96.535) Q2.2@113.747,95.519 ; 113.455,95.098 ccw(c113.455,95.811) Q2.2@113.96,95.307
  Top Layer w0.4: v2@122.25,72.746 122.279,72.746 122.452,72.746 122.795,72.746 ; v2@122.28,72.563 cw(c122.72,72.123) 122.72,72.746
  Top Layer w0.6: Q2.2@113.853,95.463 ccw(c113.352,95.964) 114.061,95.964 ; Q2.2@114.061,95.098 114.061,96.103 v1(114.219,96.261) ; 114.061,95.881 cw(c114.599,95.881) v1(114.219,96.261) ; Q2.2@114.092,95.427 cw(c114.722,95.758) v1(114.219,96.261)
  Top Layer w0.8: v1@118.008,97.409 118.008,100.358 ; 118.008,98.555 cw(c119.245,98.555) C2.2@118.371,99.429 ; C2.2@118.366,99.576 cw(c119.045,100.358) 118.008,100.358 ; C2.2@118.499,99.512 cw(c120.936,99.814) 119.2,101.55 118.008,100.358 ; v2@122.163,72.718 cw(c122.385,71.748) 123.088,72.452 ; v2(122.174,72.669) 122.279,72.746 122.453,72.873 122.452,72.746 122.452,72.667 122.441,71.347 122.43,70.077 122.43,68.989 123.088,69.647 123.088,72.452 ; v2@122.209,68.824 ccw(c121.676,69.357) 122.43,69.357 ; v2@122.21,72.704 cw(c121.62,72.124) 122.447,72.117 ; v2@122.234,70.043 ccw(c121.766,70.519) 122.434,70.513 ; v2@122.235,70.114 cw(c121.763,69.642) 122.43,69.642 ; v2@122.234,71.313 ccw(c121.741,71.814) 122.445,71.809 ; v2@122.235,71.384 cw(c121.734,70.89) 122.437,70.885 ; 122.25,75.286 122.25,73.29 122.795,72.746 123.088,72.452
  Top Layer w1: 119.939,68.882 cw(c121.745,68.882) v2@120.468,70.159 ; 119.939,70.092 ccw(c121.831,70.092) v2@120.493,68.753 ; 119.939,70.152 cw(c121.745,70.152) v2@120.468,71.429 ; 119.939,71.224 ccw(c121.745,71.224) v2@120.468,69.947 ; 119.939,71.534 cw(c121.658,71.534) v2@120.442,72.75 ; 119.939,72.494 ccw(c121.745,72.494) v2@120.468,71.217 ; 119.939,73.238 cw(c122.028,73.238) 120.551,74.715 ccw(c121.15,74.116) 120.303,74.116 ; 119.939,73.754 ccw(c121.658,73.754) v2@120.442,72.538 ; POWS.1@120.117,74.409 POWS.1@119.939,74.587 ; 120.303,73.822 POWS.1@120.303,74.223 ; v2@120.609,68.71 cw(c120.55,69.572) 119.939,68.961 ; POWS.1@120.985,74.758 cw(c121.945,74.148) 121.945,75.286 ; POWS.1@121.234,75.108 121.412,75.286 ; 121.945,75.196 121.945,75.286 ; v2@122.25,68.936 122.047,68.732 120.167,68.732 119.939,68.961 ; 119.939,68.961 POWS.1@119.939,74.587 ; POWS.1@119.939,74.587 119.939,75.057 120.167,75.286 121.412,75.286 ; 121.412,75.286 121.945,75.286
  Bottom Layer w0.3: v1(114.219,96.261) 117.114,96.261 v1(118.008,97.155) ; v1@114.325,96.155 cw(c114.581,95.899) 114.581,96.261 cw(c114.581,96.623) v1@114.325,96.367 ; v1@117.858,97.155 cw(c117.496,97.155) 117.752,96.899 cw(c118.008,96.643) v1@118.008,97.005
  Bottom Layer w0.8: v1(118.008,97.155) v1(118.008,97.892) 120.946,97.892 122.762,96.076 122.762,76.686 121.828,75.753 ; 119.837,68.715 cw(c121.535,68.715) v2@120.545,70.094 ; 119.837,69.666 cw(c122.231,69.666) v2@120.538,71.359 ; 119.837,71.048 cw(c122.145,71.048) v2@120.513,72.679 ; 119.837,71.711 ccw(c122.231,71.711) v2@120.538,70.018 ; 119.837,72.751 cw(c122.515,72.751) POWS.1@120.621,74.644 ; 119.837,72.981 ccw(c122.231,72.981) v2@120.538,71.288 ; 119.837,74.24 ccw(c122.145,74.24) v2@120.513,72.609 ; 120.229,68.656 ccw(c120.229,69.229) v2@120.635,68.824 ; v2@120.564,68.824 ccw(c120.969,69.229) 120.969,68.656 ; v2(120.574,71.323) 120.675,71.323 122.009,72.657 v2@122.174,72.657 ; v2@120.622,68.815 cw(c120.312,69.41) 119.837,68.936 ; POWS.1@121.105,74.777 cw(c122.098,74.432) 122.098,75.483 ; 121.804,68.656 ccw(c121.804,69.229) v2@122.209,68.824 ; 122.098,76.022 122.098,75.483 ; v2@122.124,68.859 cw(c123.107,68.859) 122.412,69.555 ; v2@122.173,72.719 cw(c122.196,71.421) 123.114,72.339 ; v2(122.174,72.669) v2@122.174,72.657 ; v2@122.178,72.719 cw(c122.122,72.047) 122.796,72.047 ; v2@122.209,72.705 cw(c120.792,71.288) 122.796,71.288 ; v2@122.219,72.648 ccw(c121.658,72.916) 122.098,73.355 ; 122.225,73.203 122.225,76.149 ; v2@122.235,70.043 ccw(c120.879,71.399) 122.796,71.399 ; v2@122.235,71.313 ccw(c120.909,72.657) 122.796,72.657 ; v2@122.235,71.384 cw(c120.879,70.028) 122.796,70.028 ; v2@122.24,70.108 cw(c121.739,69.751) 122.174,69.317 ; 119.837,68.936 119.837,75.057 120.263,75.483 122.098,75.483 ; 119.837,68.936 120.117,68.656 122.149,68.656 123.114,69.621 123.114,72.339 ; 122.098,73.355 122.796,72.657 ; 122.098,73.355 122.098,75.483 ; 122.174,69.317 v2@122.174,72.657 ; 122.174,69.317 122.796,69.939 122.796,72.657 ; v2@122.174,72.657 122.796,72.657 ; 122.796,72.657 ccw(c122.439,72.3) 122.145,72.71 cw(c122.439,72.3) 122.796,72.657 ; 122.796,72.657 123.114,72.339
  Bottom Layer w1: POWS.1@120.091,74.409 POWS.1@120.574,74.892 ; POWS.1@120.681,74.66 cw(c119.949,72.83) v2@121.92,72.83 ; POWS.1@120.87,75.123 ccw(c121.114,75.71) 121.564,75.26 POWS.1@121.412,75.108 ; 121.053,75.588 cw(c120.54,74.307) 121.92,74.307 ; POWS.1@121.082,75.235 POWS.1@121.209,75.108 ; 121.92,73.177 121.92,75.286 ; 121.92,72.92 ccw(c122.425,72.92) 122.068,72.563 cw(c122.425,72.92) 121.92,72.92
  other v2: 120.599,68.859 122.174,68.859 120.574,70.053 122.199,70.079 122.199,71.349 120.548,72.644
8V: 
38BC1: BC1.2 pad.0@81.559,41.834 pad.0@88.7,112.98 pad.0@91.032,112.98 R6.1 R6.2 U1.18 | length 105
  Top Layer w0.254: pad.0@81.225,42.168 ccw(c79.527,43.867) 81.928,43.867 ; pad.0@81.405,41.989 ccw(c80.14,43.253) 81.928,43.253 ; pad.0@81.584,41.809 ccw(c80.753,42.64) 81.928,42.64 ; pad.0@81.814,42.353 ccw(c81.539,42.628) 81.928,42.628 ; pad.0@81.928,41.833 81.928,44.514 84.261,46.847 84.261,51.266 86.36,53.365 86.36,59.334 83.871,61.824 v1(82.779,61.824) ; 81.928,42.67 ccw(c82.63,42.67) pad.0@82.134,42.173 ; 81.928,43.283 ccw(c83.244,43.283) BC1.2@82.314,42.353 ; v1@82.901,61.701 cw(c83.196,61.406) 83.196,61.824 cw(c83.196,62.241) v1@82.901,61.946 ; R6.1@87.376,85.658 R6.1@87.45,85.584 ; v1@87.376,86.731 88.773,88.128 v1(88.773,90.703) ; v1@87.376,87.016 ccw(c87.376,87.702) 87.861,87.217 ; v1@88.651,90.581 cw(c88.355,90.286) 88.773,90.286 cw(c89.191,90.286) v1@88.895,90.581
  Top Layer w0.3: R6.1@87.304,85.684 ccw(c87.388,86.772) 88.16,86.001 ; R6.1@87.327,85.983 ccw(c87.454,87.628) 88.621,86.462 ; R6.1@87.376,85.658 87.597,85.438 88.621,86.462 ; U1.18@91.775,87.877 89.503,87.877 88.621,86.995 88.621,86.462
  Top Layer w0.5: pad.0@88.7,112.98 pad.0@91.032,112.98
  Top Layer w0.6: R6.2@87.159,83.693 cw(c86.695,83.229) 87.351,83.229 ; R6.2@87.169,83.684 cw(c86.821,83.284) 87.351,83.284 ; R6.2@87.3,83.884 87.3,83.554 R6.2@87.351,83.605 ; v1(87.351,82.779) 87.351,83.287
  Bottom Layer w0.254: v1@82.606,61.824 ccw(c82.188,61.824) 82.483,62.119 ccw(c82.779,62.414) v1@82.779,61.997 ; v1(82.779,61.824) 81.128,63.475 81.128,74.981 84.633,78.486 84.633,79.553 87.351,82.271 v1(87.351,82.779) ; v1@87.228,82.656 cw(c86.933,82.361) 87.351,82.361 cw(c87.768,82.361) v1@87.473,82.656 ; pad.0@88.078,112.941 cw(c87.149,112.876) 87.808,112.218 ; pad.0@88.52,112.422 ccw(c88.348,111.678) 87.808,112.218 ; pad.0@88.57,112.98 87.808,112.218 ; v1@88.6,90.703 ccw(c88.182,90.703) 88.478,90.999 ccw(c88.773,91.294) v1@88.773,90.876 ; v1(88.773,90.703) 87.808,91.669 87.808,112.218
  Bottom Layer w0.3: 87.059,83.121 cw(c86.716,82.779) v1@87.201,82.779 ; v1@87.226,86.843 cw(c86.864,86.843) 87.12,86.587 cw(c87.376,86.33) v1@87.376,86.693 ; v1(87.351,82.779) 87.376,82.804 86.995,83.185 86.995,86.462 v1(87.376,86.843)
38BC2: BC2.2 pad.0@81.636,37.643 pad.0@91,116.053 R7.1 R7.2 U1.23 | length 124
  Top Layer w0.254: R7.2@85.187,80.055 ccw(c84.976,80.721) 85.674,80.721 ; R7.2@85.264,79.813 ccw(c85.086,80.374) 85.674,80.374 ; R7.2@85.3,79.609 85.534,79.375 v1@86.004,79.375 ; R7.1@85.395,77.814 R7.1@85.661,78.08 ; R7.2@85.613,79.397 cw(c85.852,79.243) 85.852,79.527 ; R7.2@85.614,79.448 cw(c85.983,79.21) 85.983,79.65 ; R7.2@85.614,79.852 ccw(c85.983,80.09) 85.983,79.65 ; R7.2@85.621,79.41 cw(c85.827,79.289) 85.827,79.527 ; R7.2@85.658,79.737 cw(c85.496,79.13) v1@86.094,79.322 ; R7.2@85.665,79.679 ccw(c85.852,79.719) 85.852,79.527 ; R7.2@85.668,79.661 ccw(c86.004,79.716) v1@86.004,79.375 ; R7.2@85.668,79.662 ccw(c85.827,79.688) 85.827,79.527 ; R7.2@85.674,79.705 85.674,80.721 ; 85.843,79.65 cw(c85.843,79.028) v1@86.321,79.427 ; 85.944,79.391 ccw(c85.981,79.531) v1@86.108,79.46 ; 86.044,79.634 cw(c85.923,79.181) v1@86.329,79.415 ; v1@86.086,79.384 ccw(c85.736,79.402) 85.983,79.65 ; v1@86.126,79.264 ccw(c85.3,78.574) R7.2@85.3,79.65 85.983,79.65 ; v1@86.136,79.253 ccw(c85.841,78.957) 85.841,79.375 ccw(c85.841,79.793) v1@86.136,79.497 ; v1@86.151,79.51 cw(c86.011,79.686) 85.852,79.527 ; v1@86.249,79.548 cw(c86.231,79.898) 85.983,79.65 ; v1(89.992,83.058) 90.812,83.878 U1.23@91.775,83.878 ; v1@89.992,83.231 ccw(c89.992,83.649) 90.288,83.353 ccw(c90.583,83.058) v1@90.165,83.058 ; U1.23@91.163,83.791 ccw(c90.953,83.581) 90.953,83.878 ccw(c90.953,84.174) U1.23@91.163,83.964 ; 91.923,116.027 92.256,115.694 92.256,111.89 91.618,111.252 90.094,111.252 87.351,108.509 87.351,99.111 84.502,96.262 84.502,81.894 85.674,80.721 ; 85.827,79.527 85.852,79.527 ; 85.852,79.527 v1@86.004,79.375 ; 85.983,79.65 v1(86.258,79.375) v1@86.004,79.375
  Top Layer w0.56: R7.1@85.463,77.853 cw(c86.258,77.137) v12(86.258,78.207) R7.1@85.661,78.207
  Top Layer w0.6: pad.0@90.373,115.937 90.373,116.738 91.669,116.738 91.923,116.484 91.923,116.027 91.211,116.027 91.121,115.937 pad.0@90.373,115.937
  Bottom Layer w0.254: 81.475,38.206 ccw(c82.01,38.742) BC2.2@82.058,37.986 ; BC2.2@82.042,38.239 cw(c81.964,39.491) 81.077,38.604 ; BC2.2@82.064,37.617 81.077,38.604 ; v1@86.085,79.375 cw(c85.668,79.375) 85.963,79.08 cw(c86.258,78.784) v1@86.258,79.202 ; v12@86.258,78.136 ccw(c86.258,78.884) 86.788,78.355 ; v12(86.258,78.207) 86.639,78.207 ; v12@86.258,78.39 ccw(c86.258,79.751) 87.221,78.788 ; v1(86.258,79.375) 85.649,78.765 85.649,78.029 82.144,74.524 82.144,64.237 86.289,60.092 86.289,53.548 84.229,51.488 84.229,47.45 81.077,44.298 81.077,38.604 ; v12@86.401,78.092 cw(c86.639,77.902) 86.639,78.207 ; v12@86.401,78.321 ccw(c86.639,78.512) 86.639,78.207 ; v1@89.87,82.936 cw(c89.575,82.64) 89.992,82.64 cw(c90.41,82.64) v1@90.115,82.936 ; v1(89.992,83.058) 89.992,82.601 87.655,80.264 87.655,79.223 86.639,78.207
  Bottom Layer w0.6: pad.0@90.765,115.937 90.5,115.937 90.5,116.713 91.161,116.713 91.542,116.332 91.542,116.027 pad.0@90.958,116.027
38OUT-1: 
38OUT-2: 
84-D: 
84ADC: Q2.3 R11.1 | length 10
  Top Layer w0.3: 109.988,88.932 113.868,92.812 Q2.3@114.864,92.812 ; 114.173,92.812 cw(c114.173,92.07) Q2.3@114.697,92.594 ; 114.197,92.812 ccw(c114.197,93.519) Q2.3@114.697,93.019
  Top Layer w0.5: R11.1@108.55,88.932 109.988,88.932 ; R11.1@108.777,88.755 cw(c109.204,88.328) 109.204,88.932 cw(c109.204,89.535) R11.1@108.777,89.109
<Z: CMZ.3 U1.13 | length 27.6
  Top Layer w0.254: CMZ.3@94.284,72.488 ccw(c93.944,72.965) 94.53,72.965 ; CMZ.3@94.53,71.944 94.53,72.965 ; CMZ.3@94.776,72.488 cw(c95.116,72.965) 94.53,72.965 ; v1@95.305,91.343 cw(c95.01,91.048) 95.428,91.048 cw(c95.845,91.048) v1@95.55,91.343 ; U1.13@95.313,90.514 ccw(c95.036,90.791) 95.428,90.791 ; U1.13@95.4,89.586 95.423,89.563 95.428,89.563 v1(95.428,91.465) ; v1@96.296,79.172 cw(c95.879,79.172) 96.174,78.876 cw(c96.469,78.581) v1@96.469,78.999 ; v1(96.469,79.172) 94.996,77.699 94.996,73.431 94.53,72.965
  Bottom Layer w0.254: v1@95.428,91.292 cw(c95.428,90.875) 95.723,91.17 cw(c96.018,91.465) v1@95.601,91.465 ; v1(95.428,91.465) 96.495,90.399 96.495,85.954 95.499,84.958 95.499,82.809 96.469,81.839 v1(96.469,79.172) ; v1@96.347,79.294 ccw(c96.052,79.589) 96.469,79.589 ccw(c96.887,79.589) v1@96.592,79.294
AM: CMZ.5 U1.15 | length 39.4
  Top Layer w0.254: v1@87.559,88.443 cw(c87.141,88.443) 87.436,88.147 cw(c87.732,87.852) v1@87.732,88.27 ; v1(87.732,88.443) 86.309,87.02 86.309,82.626 88.24,80.696 88.24,74.701 88.824,74.117 ; 88.25,74.691 ccw(c89.218,75.658) v1@89.218,74.29 ; 88.684,74.257 ccw(c89.218,74.791) v1@89.218,74.036 ; v1@89.09,74 ccw(c88.824,73.756) 88.824,74.117 ; v1@89.09,74.234 cw(c88.824,74.479) 88.824,74.117 ; v1(89.218,74.117) 88.824,74.117 ; v1@93.654,88.184 ccw(c93.359,88.479) 93.777,88.479 ccw(c94.194,88.479) v1@93.899,88.184 ; v1(93.777,88.062) U1.15@93.777,89.902 ; 93.777,89.024 cw(c94.153,89.024) U1.15@93.887,89.29
  Bottom Layer w0.254: v1@87.854,88.32 cw(c88.149,88.025) 88.149,88.443 cw(c88.149,88.86) v1@87.854,88.565 ; v1@87.986,88.443 93.396,88.443 v1(93.777,88.062) ; v1@89.184,73.947 cw(c89.083,73.426) 89.523,73.723 ; v1@89.218,73.944 cw(c89.218,73.527) 89.513,73.822 cw(c89.808,74.117) v1@89.39,74.117 ; v1(89.218,74.117) 90.53,72.805 ; v1@89.341,73.994 cw(c87.49,72.144) CMZ.5@90.107,72.144 ; v1@89.387,74.084 ccw(c89.686,74.026) 89.434,73.856 ; 89.774,73.561 cw(c88.357,72.144) CMZ.5@90.361,72.144 ; 90.208,73.127 cw(c89.225,72.144) CMZ.5@90.615,72.144 ; CMZ.5@90.353,72.528 ccw(c90.225,72.805) 90.53,72.805 ; CMZ.5@90.53,71.944 90.53,72.805 ; CMZ.5@90.641,72.693 cw(c90.092,72.144) CMZ.5@90.869,72.144 ; CMZ.5@90.707,72.528 cw(c90.835,72.805) 90.53,72.805 ; v1@93.604,88.062 ccw(c93.186,88.062) 93.481,88.357 ccw(c93.777,88.652) v1@93.777,88.235
AM-D: 
BCG: R5.2 U1.25 | length 47.2
  Top Layer w0.254: U1.25@92.913,82.464 ccw(c92.703,82.674) 93,82.674 ccw(c93.297,82.674) U1.25@93.087,82.464 ; U1.25@93,81.189 U1.25@93,81.853 93,82.815 94.31,84.125 v1(94.31,84.887) ; v1@94.188,84.764 cw(c93.893,84.469) 94.31,84.469 cw(c94.728,84.469) v1@94.433,84.764
  Top Layer w0.3: v1@92.865,92.1 ccw(c92.503,92.1) 92.759,92.356 ccw(c93.015,92.613) v1@93.015,92.25 ; v1(93.015,92.1) 92.304,92.812 92.304,95.25 90.78,96.774 90.78,100.025 91.745,100.99 95.402,100.99 97.961,103.549 107.429,103.549 108.127,102.85 R5.2@110.3,102.85 ; R5.2@110.053,102.602 ccw(c109.455,102.005) 109.455,102.85 ccw(c109.455,103.695) R5.2@110.053,103.097
  Bottom Layer w0.254: v1@93.015,91.927 cw(c93.015,91.51) 93.31,91.805 cw(c93.605,92.1) v1@93.188,92.1 ; v1(93.015,92.1) 95.479,89.637 95.479,86.385 94.31,85.217 ; v1@94.212,85.029 ccw(c94.082,85.217) 94.31,85.217 ; v1(94.31,84.887) 94.31,85.217 ; v1@94.409,85.029 cw(c94.539,85.217) 94.31,85.217
BH1: CMZ1.4 R22.1 R22.2 U1.20 | length 74.3
  Top Layer w0.254: v1(84.201,39.827) 85.268,40.894 85.268,43.231 84.769,43.73 84.769,51.038 86.944,53.213 86.944,59.69 85.014,61.62 85.014,66.446 v1@85.166,66.599 ; v1@84.201,40 ccw(c84.201,40.418) 84.496,40.123 ccw(c84.792,39.827) v1@84.374,39.827 ; 85.014,65.864 cw(c85.952,65.864) v1@85.289,66.527 ; v1@90.17,69.723 91.516,71.069 91.516,73.431 91,73.948 91,75.369 R22.1@91.161,75.53 ; v1@90.17,70.048 ccw(c90.17,70.834) 90.725,70.278 ; 90.285,78.106 cw(c89.46,77.28) R22.2@90.627,77.28 ; 90.552,77.839 ccw(c91,78.287) R22.2@91,77.653 ; R22.1@90.736,75.216 cw(c90.1,74.58) 91,74.58 cw(c91.901,74.58) R22.1@91.264,75.216 ; R22.2@91.161,77.23 90.145,78.246 90.145,79.654 88.671,81.128 88.671,85.471 89.478,86.278 U1.20@91.775,86.278 ; U1.20@91.163,86.191 ccw(c90.953,85.981) 90.953,86.278 ccw(c90.953,86.574) U1.20@91.163,86.364
  Bottom Layer w0.254: v1@84.079,39.705 cw(c83.783,39.41) 84.201,39.41 cw(c84.619,39.41) v1@84.323,39.705 ; v1(84.201,39.827) 84.201,38.989 84.633,38.557 84.633,35.323 85.42,34.535 ; CMZ1.4@84.861,33.218 ccw(c83.59,34.535) 85.42,34.535 ; CMZ1.4@85.03,32.7 85.42,33.09 85.42,34.535 ; CMZ1.4@85.037,33.036 ccw(c84.167,33.937) 85.42,33.937 ; v1@85.044,66.772 ccw(c84.749,67.067) 85.166,67.067 ccw(c85.584,67.067) v1@85.289,66.772 ; CMZ1.4@85.09,33.147 ccw(c85.814,33.147) CMZ1.4@85.302,32.635 ; v1@85.166,66.599 85.166,68.707 86.335,69.875 90.018,69.875 v1@90.17,69.723 ; v1@90.048,69.753 ccw(c89.752,69.458) 89.752,69.875 ccw(c89.752,70.293) v1@90.048,69.998
  other v1: 85.166,66.65 90.17,69.875
BH2: CMZ1.5 R23.1 R23.2 U1.21 | length 76.8
  Top Layer w0.254: R23.1@81.894,52.832 R23.1@81.941,52.879 ; R23.2@83.641,52.879 R23.2@83.92,52.6 ; v1(89.84,85.471) 91.769,85.471 U1.21@91.775,85.478 ; v1@89.962,85.349 cw(c90.257,85.053) 90.257,85.471 cw(c90.257,85.889) v1@89.962,85.593 ; 90.937,85.471 ccw(c90.937,85.79) U1.21@91.163,85.564 ; 90.969,85.471 cw(c90.969,85.196) U1.21@91.163,85.391
  Top Layer w0.6: v1(80.823,52.832) R23.1@81.894,52.832 ; v1@80.848,52.832 cw(c80.848,51.557) R23.1@81.75,52.459 ; R23.2@83.691,52.8 ccw(c83.691,53.953) 84.507,53.138 ; R23.2@83.92,52.6 83.969,52.6 v1(84.785,53.416)
  Bottom Layer w0.254: 80.569,51.801 cw(c81.854,51.801) v1@80.945,52.71 ; 80.569,52.414 cw(c81.24,52.414) v1@80.766,52.889 ; v1(80.823,52.832) 80.569,52.578 80.569,34.417 83.617,31.369 86.03,31.369 ; v1(84.785,53.416) 85.781,54.412 85.781,59.881 81.636,64.026 81.636,74.752 85.141,78.257 85.141,79.223 88.773,82.855 88.773,84.404 v1(89.84,85.471) ; v1@84.785,53.589 ccw(c84.785,54.007) 85.081,53.712 ccw(c85.376,53.416) v1@84.958,53.416 ; CMZ1.5@86.308,32.361 cw(c85.287,32.112) 86.03,31.369 ; 86.349,31.688 ccw(c85.8,32.237) CMZ1.5@86.554,32.422 ; CMZ1.5@86.62,32.7 86.62,31.959 86.03,31.369 ; v1@89.667,85.471 cw(c89.249,85.471) 89.544,85.176 cw(c89.84,84.88) v1@89.84,85.298
BI-R: U1.22 U2.2 | length 36.1
  Top Layer w0.254: U1.22@91.163,84.591 ccw(c90.953,84.381) 90.953,84.678 ccw(c90.953,84.974) U1.22@91.163,84.764 ; U1.22@91.775,84.678 90.316,84.678 89.23,83.591 89.23,81.458 91.237,79.451 92.428,79.451 92.989,78.89 v1(92.989,76.022) ; v1@92.867,76.145 ccw(c92.572,76.44) 92.989,76.44 ccw(c93.407,76.44) v1@93.112,76.145
  Top Layer w0.6: U2.2@107.854,74.092 v1(109.372,74.092)
  Bottom Layer w0.254: v1@92.932,76.079 cw(c93.346,75.666) 93.346,76.251 ; v1(92.989,76.022) 93.218,76.251 106.876,76.251 109.035,74.092 ; v1@93.112,75.9 cw(c93.959,75.053) 93.959,76.251 ; 108.502,74.625 ccw(c109.372,75.496) v1@109.372,74.265 ; 108.935,74.192 ccw(c109.372,74.629) v1@109.372,74.011 ; v1@109.232,73.991 ccw(c109.035,73.85) 109.035,74.092 ; v1@109.232,74.193 cw(c109.035,74.334) 109.035,74.092 ; v1(109.372,74.092) 109.035,74.092